# Altium PCB UI.PcbDoc
Units mil, origin at the board's own origin, x right, y up, seen from the top; angles counter-clockwise.
Board outline 2834.65 x 866.14 mil, 2 copper layers (Top Layer, Bottom Layer); 10 components, 8 nets, 31 pads, 0 vias.
Unrouted connection lines stored in the file: 1.
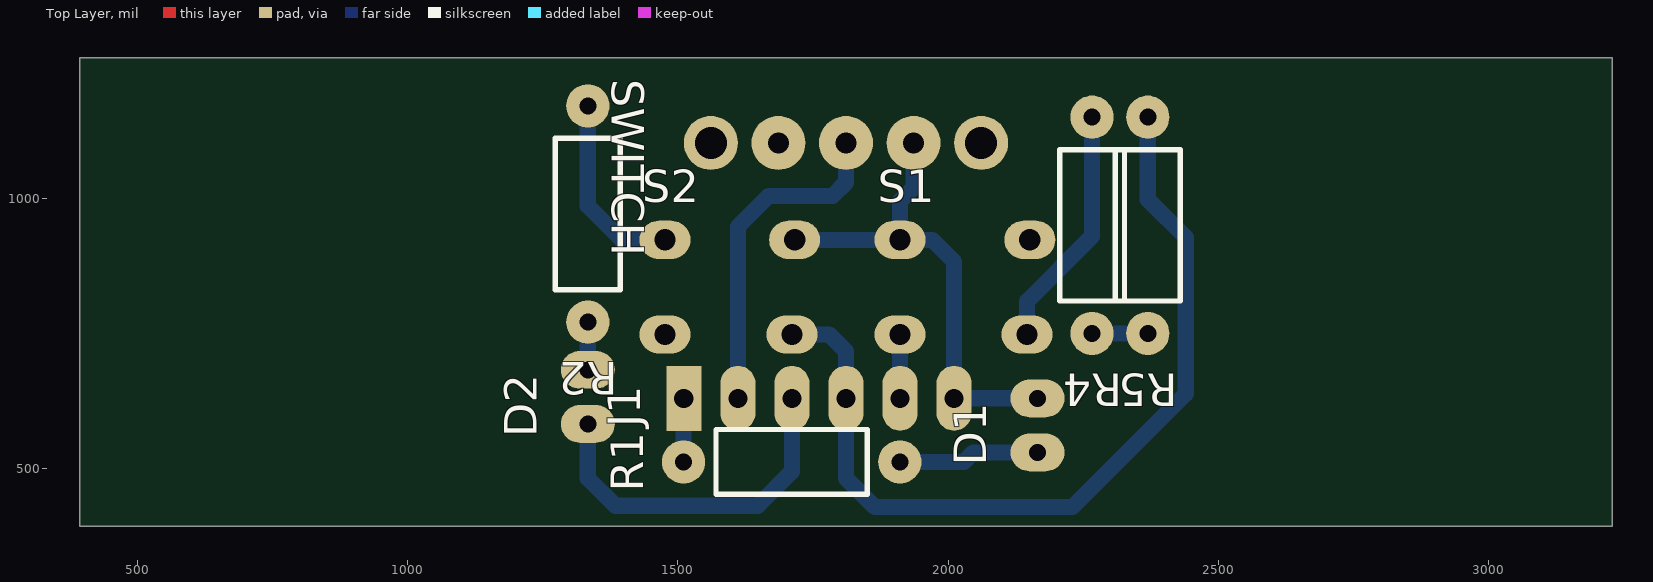
[diagram p0: Top Layer view]
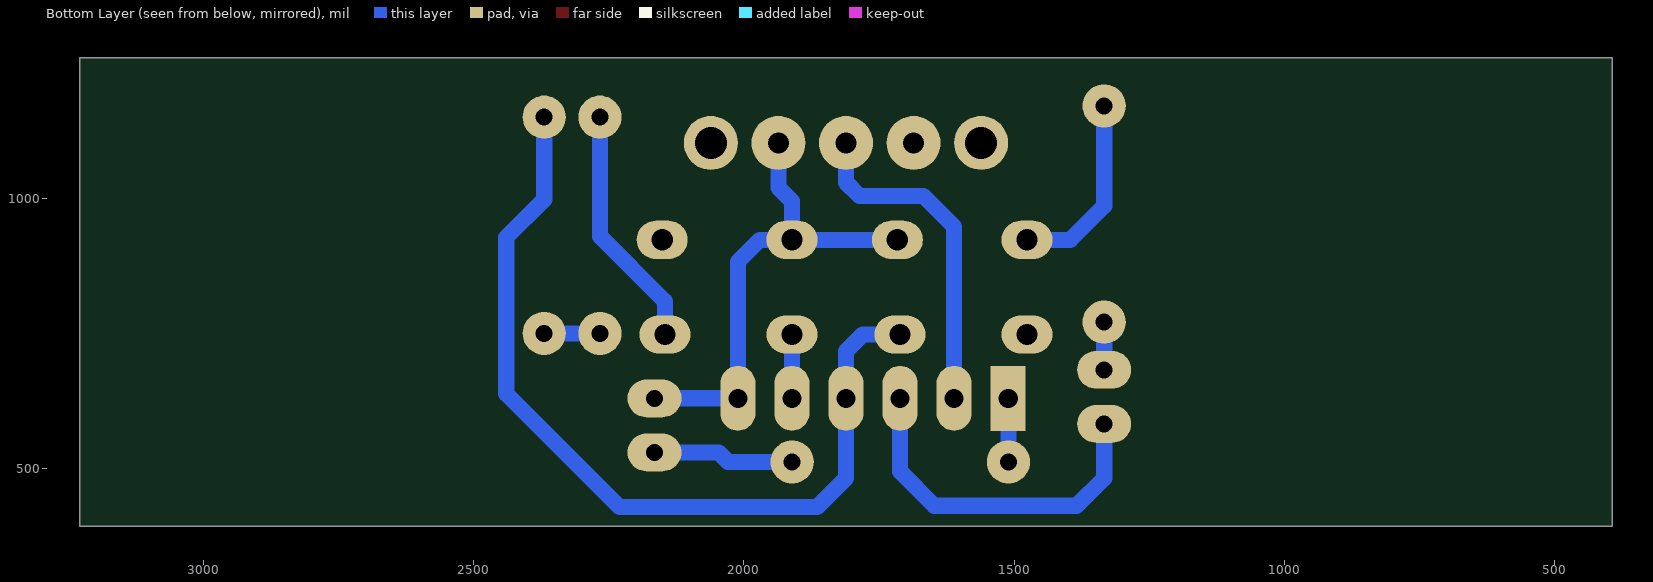
[diagram p1: Bottom Layer view, seen from below]

## Layer stack, top to bottom
Top Solder: solder mask 0.4, Solder Resist, Dk 3.5
Top Layer: signal copper 1.4
Dielectric 1: dielectric 12.6, FR-4, Dk 4.8
Bottom Layer: signal copper 1.4
Bottom Solder: solder mask 0.4, Solder Resist, Dk 3.5

## Board outline
393.7,393.7 3228.35,393.7 3228.35,1259.84 393.7,1259.84

## Design rules (kind name [scope] priority, off if disabled: settings)
Clearance [All] p1: gap=10
PolygonConnect [All] p1: connectstyle=Relief reliefconductorwidth=10 reliefentries=4 polygonreliefangle="90 Angle" airgapwidth=10
RoutingVias [All] p1: holewidth=28 width=50 viastyle="Through Hole" minholewidth=28 minwidth=50 maxholewidth=28 maxwidth=50
SolderMaskExpansion [All] p1: expansion=4
Width [All] p1: maxlimit=30 minlimit=30 preferedwidth=30
30 further rules are at their usual default settings.

## Components (designator, comment, footprint, x,y, rotation, side; value= is the part's Value field where it differs from the comment)
D1 "LED" LED-3MM-YELLOW 2165.35,579.92 r90 top
D2 "LED" LED-3MM-RED 1333.46,632.68 r90 top
J1 "Placa UI" "Header 1x6" 1511.02,629.92 r90 top
R1 "RES" RES-Axial-400mil 1910.63,512.2 r180 top
R2 "RES" RES-Axial-400mil 1333.46,1170.87 r270 top
R4 "RES" RES-Axial-400mil 2266.14,1150 r270 top
R5 "RES" RES-Axial-400mil 2369.29,1150 r270 top
S1 "BUTTON" TACT_SWITCH-SMALL-4PIN 1911.02,748.03 r0 top
S2 "BUTTON" TACT_SWITCH-SMALL-4PIN 1476.02,748.03 r0 top
SWITCH "SLIDE-SWITCH" SWITCH 1811.02,1102.36 r180 top

## Footprints (in the part's own frame and the unit in brackets; to place one, negate y for a bottom-side part, rotate by r counter-clockwise, add the part's x,y. Pads: shape width x height; smd on the part's side, far side on the other; paste and mask are expansions set on the pad)
"Header 1x6" [mil]
  rect 120x65 hole 35.43: 1(0,0)
  oval 120x65 hole 35.43: 2(0,-100) 3(0,-200) 4(0,-300) 5(0,-400) 6(0,-500)
  body extent -49,-550 49,50, height 336
LED-3MM-RED [mil]
  oval 70x100 hole 31.5: A(-50,0) K(50,0)
  body extent -66,-65 64,65, height 217
LED-3MM-YELLOW [mil]
  oval 70x100 hole 31.5: A(-50,0) K(50,0)
  body extent -66,-65 64,65, height 217
RES-Axial-400mil [mil]
  round 80 hole 31.5: 1(0,0) 2(400,0)
  silkscreen extent 60,-60 340,60, body extent -12,-44 410,44, height 94
SWITCH [mm]
  round 2.54 hole 1: 1(-3.175,0) 2(0,0) 3(3.175,0)
  round 2.54 hole 1.5: 4(-6.35,0) 4(6.35,0)
  body extent -7,-3.1 7,3.1, height 9.65
TACT_SWITCH-SMALL-4PIN [mm]
  oval 2.4x1.8 hole 1: 1(0,4.445) 1(6.096,4.445) 2(0,0) 2(5.969,0)
  body extent -0.94,-0.79 7.04,5.21, height 5.15

## Part data
J1: library part "Header 1x6"

## Nets (pads, with @x,y where several pads share a name; then routed paths per layer and width w, separated by ;. In a path a pad name is that pad's centre, name@x,y a point inside that pad or via, vN(x,y) a via of type N, cw(c..) or ccw(c..) an arc to the next point about the centre after c; other vN are vias at no path point)
BTN1: J1.5 R4.1 S1.2 | length 569.8
  Bottom Layer w30: J1.5 S1.2@1911.02,748.03 ; S1.2@2146.02,748.03 2146.02,809.41 2266.14,929.53 R4.1
BTN2: J1.4 R5.1 S2.2 | length 1625.4
  Bottom Layer w30: S2.2@1711.02,748.03 1779.92,748.03 1811.02,716.93 J1.4 1811.02,482.28 1864.57,428.74 2229.53,428.74 2439.37,638.58 2439.37,927.56 2369.29,997.64 R5.1
GND: D1.K J1.6 R2.1 S1.1 S2.1 SWITCH.1 | length 1262.1
  Bottom Layer w30: R2.1 1333.46,985.83 1396.26,923.03 S2.1@1476.02,923.03 ; S2.1@1716.02,923.03 S1.1@1911.02,923.03 ; SWITCH.1 1936.02,1019.88 1911.02,994.88 S1.1@1911.02,923.03 ; D1.K J1.6 2011.02,882.68 1970.67,923.03 S1.1@1911.02,923.03
LED: D2.A J1.3 | length 660.8
  Bottom Layer w30: D2.A 1333.46,482.28 1384.65,431.1 1647.64,431.1 1711.02,494.49 J1.3
NetD1_A: D1.A R1.1 | length 262.1
  Bottom Layer w30: R1.1 2029.13,512.2 2046.85,529.92 D1.A
NetD2_K: D2.K R2.2 | length 88.2
  Bottom Layer w30: D2.K R2.2
SWITCH: J1.2 SWITCH.2 | length 624.5
  Bottom Layer w30: J1.2 1611.02,947.24 1668.11,1004.33 1786.22,1004.33 1811.02,1029.13 SWITCH.2
VCC: J1.1 R1.2 R4.2 R5.2 | length 221
  Bottom Layer w30: R1.2 1510.63,629.53 J1.1 ; R4.2 R5.2
pads on no net: SWITCH.3 SWITCH.4

## Silkscreen, mask and mechanical layers (free items; w line width, h text height)
Mechanical 1:
  the board outline again, w10
Mechanical 15:
  lines w10: 1811.02,393.7 1811.02,1259.84